# Altium PCB PCB1.PcbDoc
Units mm, origin at the board's own origin, x right, y up, seen from the top; angles counter-clockwise.
Board outline 47 x 23 mm, 2 copper layers (Top Layer, Bottom Layer); 12 components, 10 nets, 38 pads, 0 vias.
Unrouted connection lines stored in the file: 5.
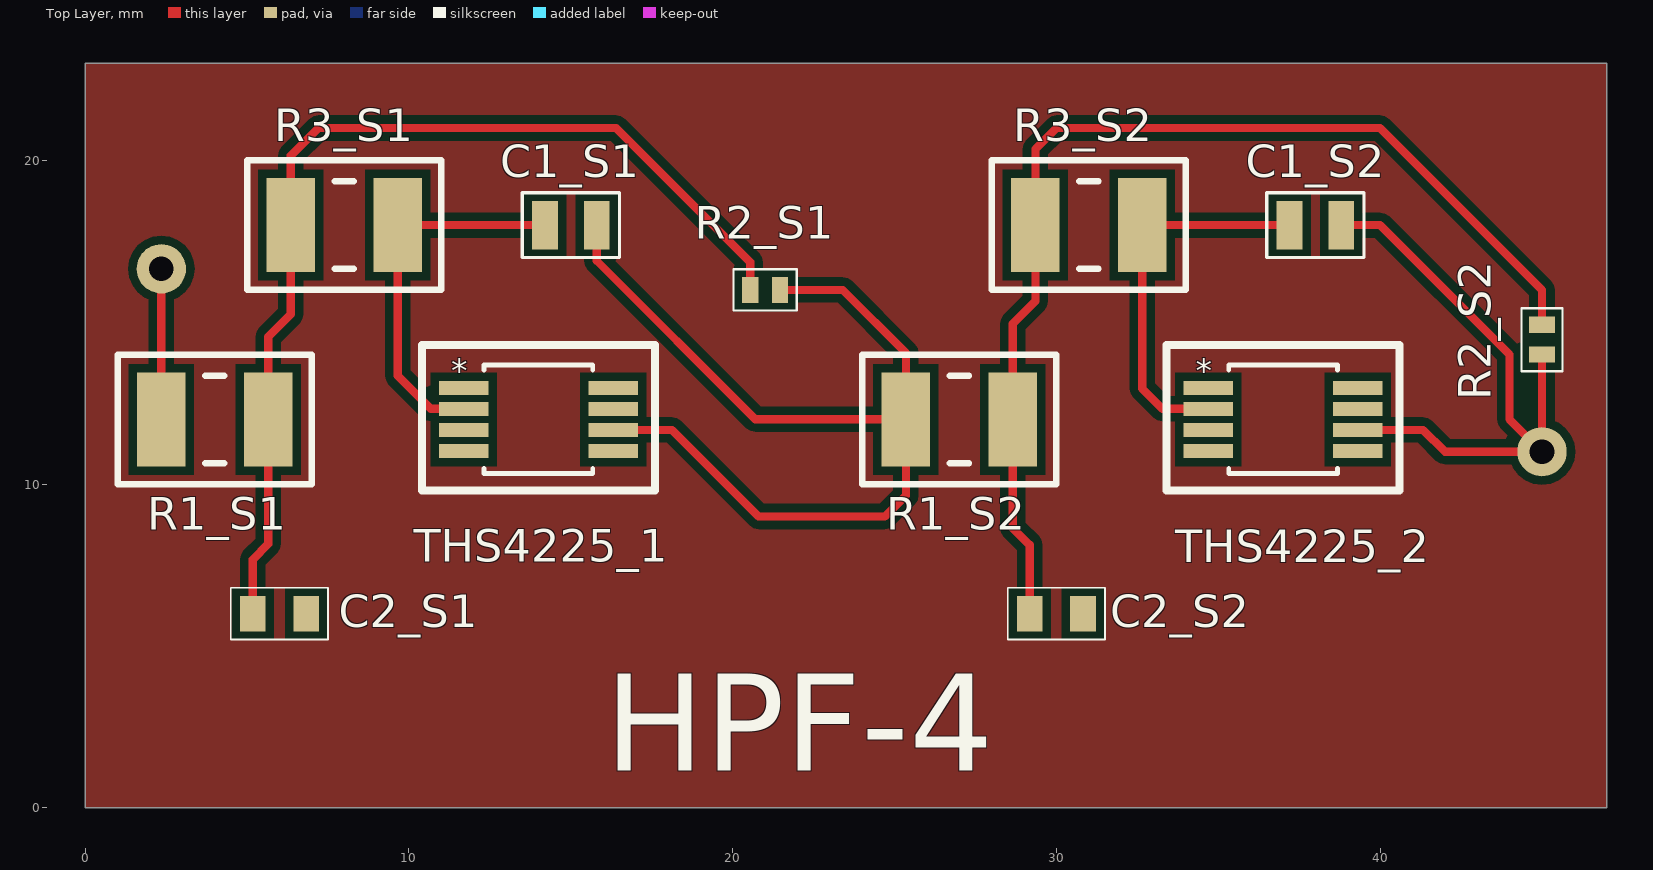
[diagram p0: Top Layer view]
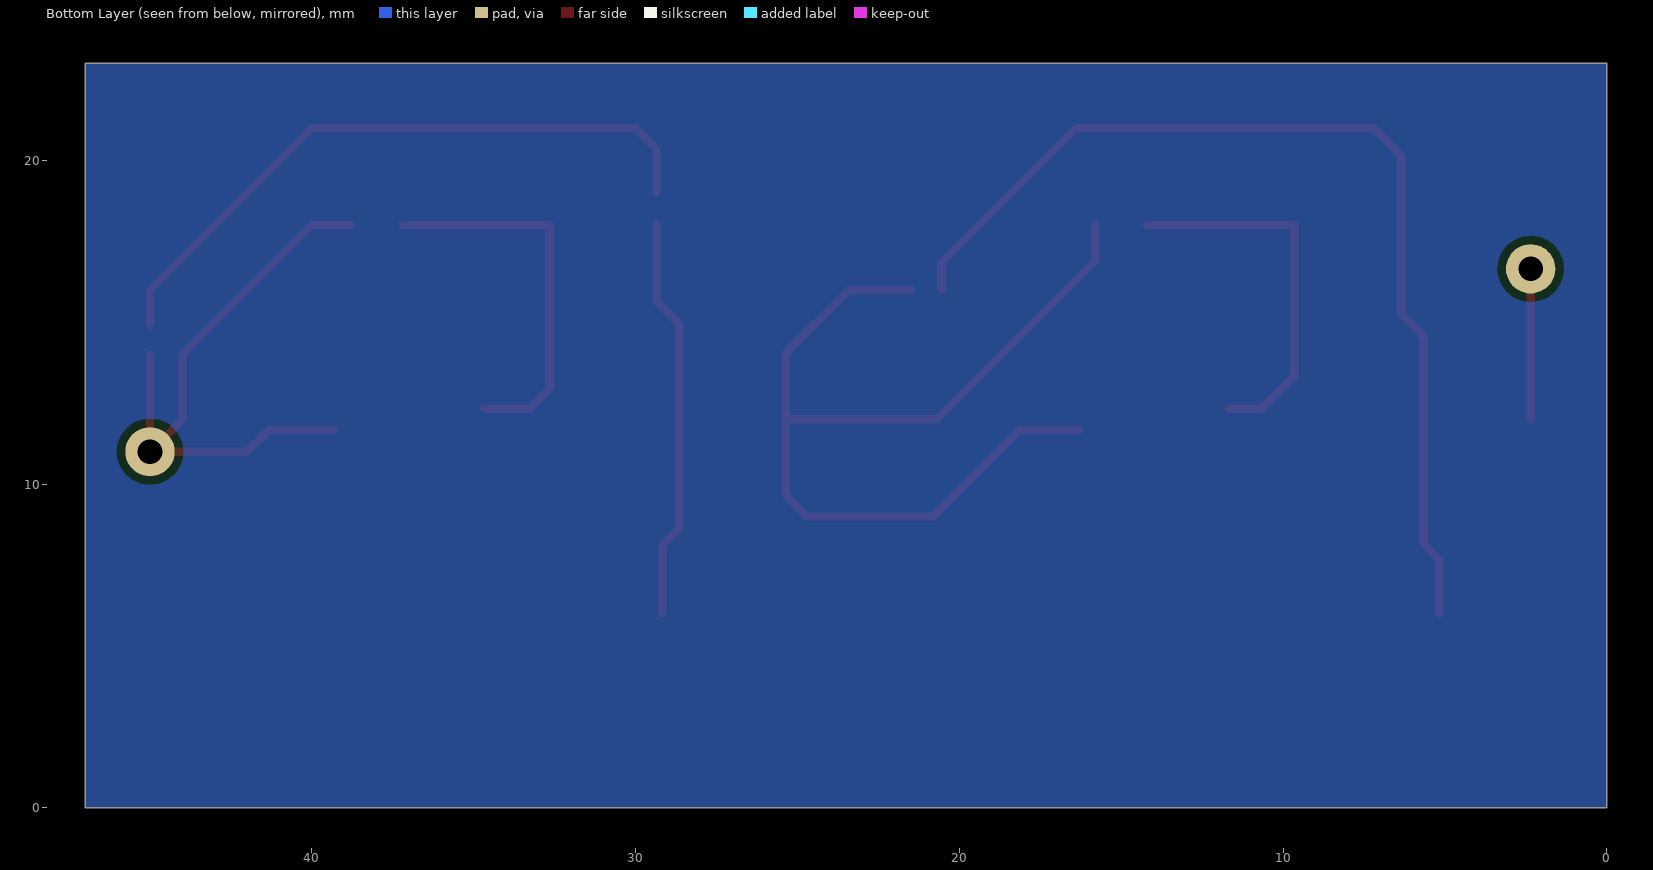
[diagram p1: Bottom Layer view, seen from below]

## Layer stack, top to bottom
Top Solder: solder mask 0.0102, Solder Resist, Dk 3.5
Top Layer: signal copper 0.0356
Dielectric 1: dielectric 0.32, FR-4, Dk 4.8
Bottom Layer: signal copper 0.0356
Bottom Solder: solder mask 0.0102, Solder Resist, Dk 3.5

## Board outline
0,0 47,0 47,23 0,23

## Design rules (kind name [scope] priority, off if disabled: settings)
Clearance [All] p1: gap=0.254 ignorepadtopadclearanceinfootprint=FALSE except(0: Arc-Hole Track-Hole SMDPad-Hole THPad-Hole Via-Hole Fill-Hole Poly-Hole Region-Hole Text-Hole)
PolygonConnect [All] p1: connectstyle=Relief reliefconductorwidth=0.254 reliefentries=4 polygonreliefangle="90 Angle" airgapwidth=0.254
RoomDefinition Sheet1 [InComponentClass('Sheet1')] p1: confinementstyle=ConfineIn formatcopy=TRUE lockcomponents=FALSE outline -29.602,-20.687 84.398,-20.687 84.398,53.963 -29.602,53.963
RoutingVias [All] p1: holewidth=0.711 width=1.27 viastyle="Through Hole" minholewidth=0.711 minwidth=1.27 maxholewidth=0.711 maxwidth=1.27
SolderMaskExpansion [All] p1: expansion=0.102 istentingtop=FALSE
Width [All] p1: maxlimit=0.254 minlimit=0.254 preferedwidth=0.254
30 further rules are at their usual default settings.

## Classes and differential pairs
component class Sheet1: C1_S1 C1_S2 C2_S1 C2_S2 R1_S1 R2_S2 R3_S2 THS4225_1 THS4225_2

## Components (designator, comment, footprint, x,y, rotation, side; value= is the part's Value field where it differs from the comment)
C1_S1 "0603" 0603 15,18 r0 top
C1_S2 "0603" 0603 38,18 r0 top
C2_S1 "1885" 1885 6,6 r0 top
C2_S2 "1885" 1885 30,6 r0 top
R1_S1 "1206" 1206 4,12 r180 top
R1_S2 "1206" 1206 27,12 r180 top
R2_S1 "0402" 0402 21,16 r0 top
R2_S2 "0402" 0402 45,14.46 r270 top
R3_S1 "1206" 1206 8,18 r180 top
R3_S2 "1206" 1206 31,18 r180 top
THS4225_1 "THS4225DGK" DGK8-M 14,12 r0 top
THS4225_2 "THS4225DGK" DGK8-M 37,12 r0 top

## Footprints (in the part's own frame and the unit in brackets; to place one, negate y for a bottom-side part, rotate by r counter-clockwise, add the part's x,y. Pads: shape width x height; smd on the part's side, far side on the other; paste and mask are expansions set on the pad)
0402 [mm] "Chip Capacitor, 2-Leads, Body 1,00x0,50mm, IPC Medium Density"
  rect 0.5x0.8 smd: 1(-0.46,0) 2(0.46,0)
  silkscreen extent -0.97,-0.64 0.97,0.64, body extent -0.53,-0.28 0.53,0.27, height 0.38
0603 [mm]
  rect 0.8x1.5 smd: 1(0.8,0) 2(-0.8,0)
  silkscreen extent -1.5,-1 1.5,1, body extent -0.88,-0.48 0.87,0.48, height 0.7
1206 [mm]
  rect 1.5x2.9 smd: 1(1.65,0) 2(-1.65,0)
  silkscreen extent -3,-2 3,2, body extent -1.75,-0.95 1.75,0.95, height 0.7
1885 [mm]
  rect 0.8x1.1 smd: 1(-0.825,0) 2(0.825,0)
  silkscreen extent -1.5,-0.8 1.5,0.8, body extent -0.85,-0.45 0.85,0.45, height 0.8
DGK8-M [mm]
  rect 1.528x0.431 smd paste+0 mask+0: 1(-2.313,0.975) 2(-2.313,0.325) 3(-2.313,-0.325) 4(-2.313,-0.975) 5(2.313,-0.975) 6(2.313,-0.325) 7(2.313,0.325) 8(2.313,0.975)
  silkscreen extent -3.6,-2.2 3.6,2.3, body extent -2.53,-1.55 2.53,1.55, height 1.09

## Part data
THS4225_1 THS4225_2: library part 4225, Mfr_Name="Texas Instruments", Copyright="Copyright (C) 2021 Ultra Librarian. All rights reserved.", Manufacturer_Part_Number=THS4225DGK, RefDes=RefDes, Type=DEV

## Free pads (board coordinates)
  round 1.524 hole 0.762: 2(45,11) 3(2.35,16.65)

## Nets (pads, with @x,y where several pads share a name; then routed paths per layer and width w, separated by ;. In a path a pad name is that pad's centre, name@x,y a point inside that pad or via, vN(x,y) a via of type N, cw(c..) or ccw(c..) an arc to the next point about the centre after c; other vN are vias at no path point)
GND: C2_S1.2 C2_S2.2 THS4225_1.3 THS4225_2.3
NetC1_S1_1: C1_S1.1 R1_S2.1 R2_S1.2 THS4225_1.6 | length 32.2
  Top Layer w0.254: C1_S1.1 15.8,16.9 20.7,12 R1_S2.1 ; THS4225_1.6 18.125,11.675 20.8,9 24.7,9 25.35,9.65 R1_S2.1 ; R2_S1.2 23.4,16 25.35,14.05 R1_S2.1
NetC1_S1_2: C1_S1.2 R3_S1.2 THS4225_1.2 | length 11.7
  Top Layer w0.254: THS4225_1.2 10.675,12.325 9.65,13.35 R3_S1.2 C1_S1.2
NetC1_S2_1: C1_S2.1 pad.2 R2_S2.2 THS4225_2.6 | length 19.2
  Top Layer w0.254: C1_S2.1 40,18 44,14 44,12 pad.2 ; THS4225_2.6 41.325,11.675 42,11 pad.2 ; R2_S2.2 pad.2
NetC1_S2_2: C1_S2.2 R3_S2.2 THS4225_2.2 | length 11.9
  Top Layer w0.254: THS4225_2.2 33.275,12.325 32.65,12.95 R3_S2.2 C1_S2.2
NetC2_S1_1: C2_S1.1 R1_S1.2 R2_S1.1 R3_S1.1 | length 31.8
  Top Layer w0.254: C2_S1.1 5.175,7.675 5.65,8.15 R1_S1.2 5.65,14.55 6.35,15.25 R3_S1.1 6.35,20.15 7.2,21 16.4,21 20.54,16.86 R2_S1.1
NetC2_S2_1: C2_S2.1 R1_S2.2 R2_S2.1 R3_S2.1 | length 32.9
  Top Layer w0.254: C2_S2.1 29.175,8.125 28.65,8.65 R1_S2.2 28.65,14.95 29.35,15.65 R3_S2.1 ; R3_S2.1@29.35,19 29.35,20.35 30,21 40,21 45,16 R2_S2.1
NetR1_S1_1: pad.3 R1_S1.1 | length 4.6
  Top Layer w0.254: R1_S1.1 pad.3
Vcc: THS4225_1.7 THS4225_2.7
Vee: THS4225_1.4 THS4225_2.4
pads on no net: THS4225_1.1 THS4225_1.5 THS4225_1.8 THS4225_2.1 THS4225_2.5 THS4225_2.8

## Polygon pours and split planes (outlines as drawn)
no net on Top Layer "NONET_L01_P001" (solid, pour order 1): 0,23 47,23 47,0 0,0
no net on Top Layer "NONET_L01_P000" (solid, pour order 0): 0,23
no net on Bottom Layer "NONET_L02_P002" (solid, pour order 2): 0,23 47,23 47,0 0,0

## Silkscreen, mask and mechanical layers (free items; w line width, h text height)
Top Overlay:
  text "HPF-4" at 16.04,1.14 h3

## Text inside footprints (layer, text, board x,y; h text height)
THS4225_1: Top Overlay "*" at 11.3,12.9 h1.27; Mechanical 13 "*" at 12.514,12.203 h1.27
THS4225_2: Top Overlay "*" at 34.3,12.9 h1.27; Mechanical 13 "*" at 35.514,12.203 h1.27